# Altium PCB LKAS-EPS_PCB_V2I5.PcbDoc (part 2 of 2)
Units mm, origin at the board's own origin, x right, y up, seen from the top; angles counter-clockwise.
Board outline 49.4 x 33.91 mm, 4 copper layers (Top Layer, Layer 1, Layer 2, Bottom Layer), stack 0.602 mm thick; 54 components, 68 nets, 241 pads, 110 vias.
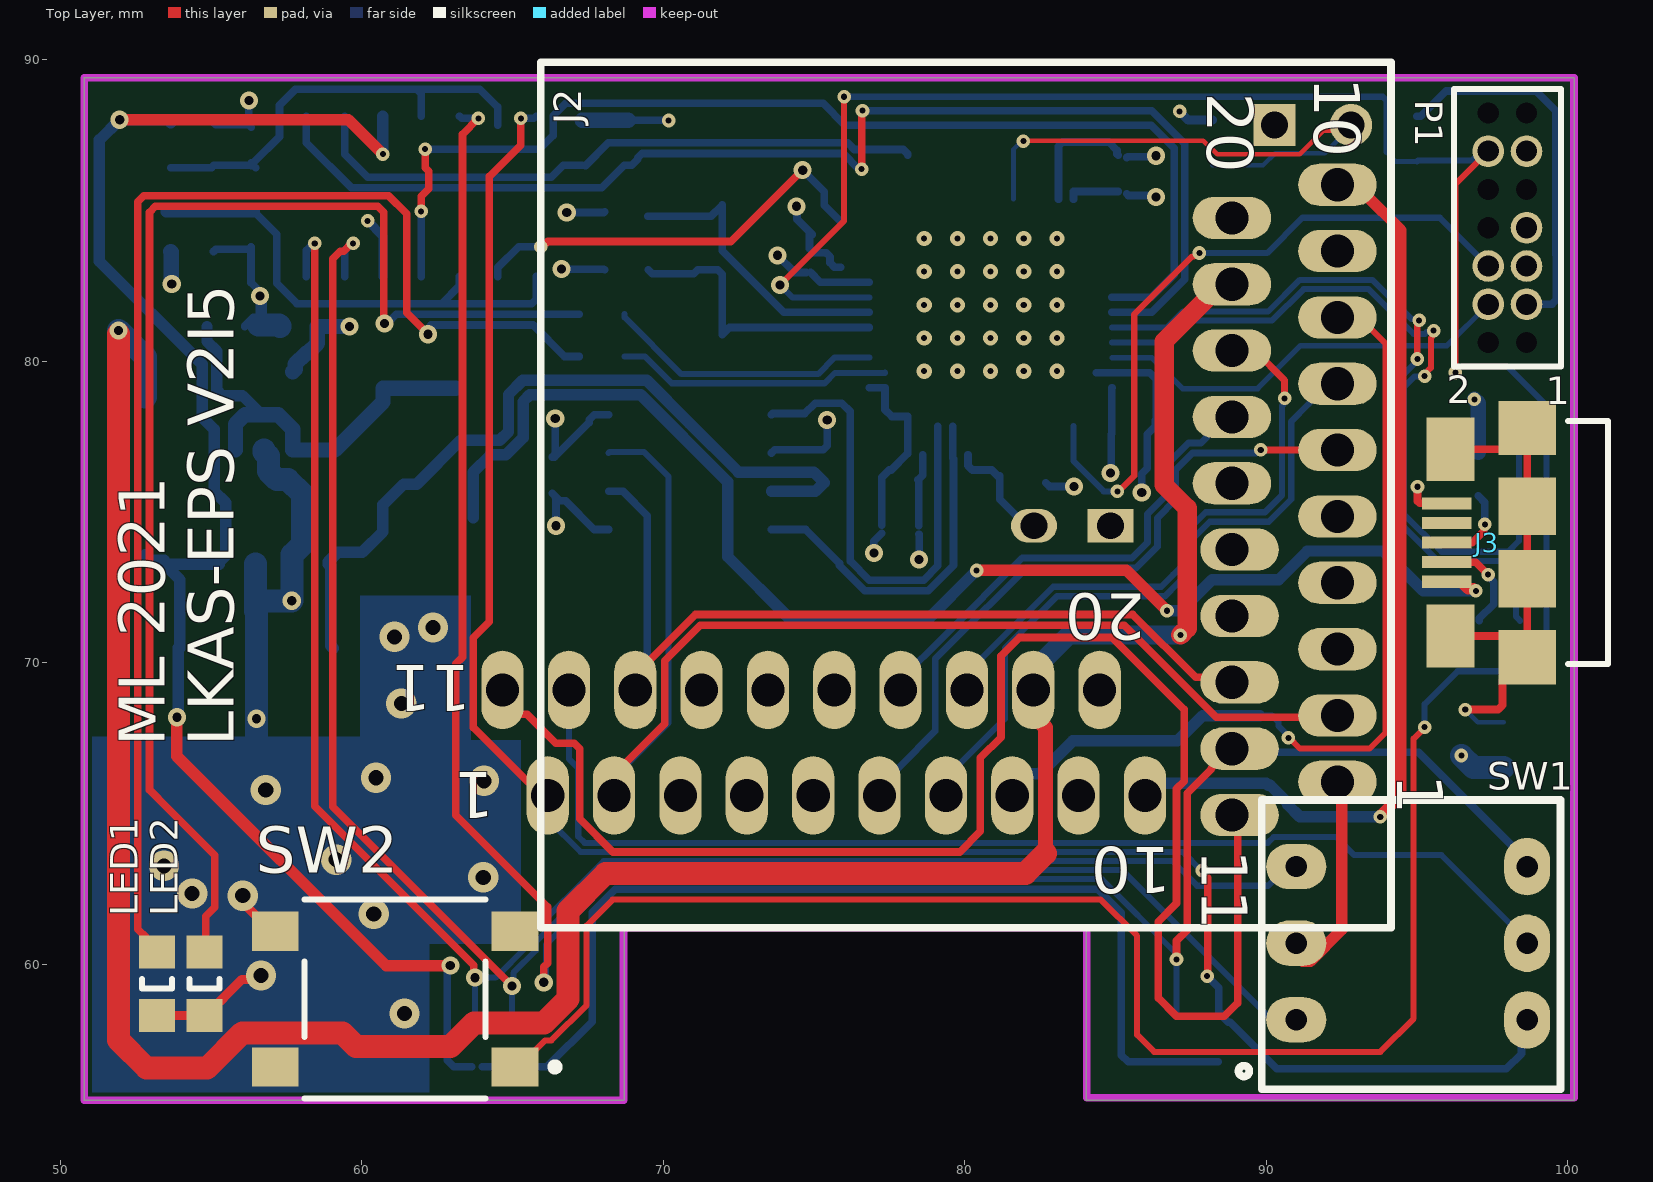
[diagram p0: Top Layer view]

## Via types
v1: diameter 0.45, hole 0.2, Top Layer to Bottom Layer, tented both sides, 38 vias
v2: diameter 0.6, hole 0.305, Top Layer to Bottom Layer, tented both sides, 31 vias
v3: diameter 0.5, hole 0.2, Top Layer to Bottom Layer, 25 vias
v4: diameter 1, hole 0.5, Top Layer to Bottom Layer, tented both sides, 14 vias
v5: diameter 0.45, hole 0.2, Top Layer to Bottom Layer, 2 vias

## Nets (pads, with @x,y where several pads share a name; then routed paths per layer and width w, separated by ;. In a path a pad name is that pad's centre, name@x,y a point inside that pad or via, vN(x,y) a via of type N, cw(c..) or ccw(c..) an arc to the next point about the centre after c; other vN are vias at no path point) (continued)
LDW_OFF_SW: (continued)
  Bottom Layer w0.381: J1.8 81.573,65.854 82.044,66.325 82.49,66.325 83.576,67.412 87.046,67.412 87.884,68.25 89.789,68.25
LKAS_TO_EPS_RX: J2.1 SW1.C1 | length 6.7
  Top Layer w0.381: SW1.C1@91.204,60.11 91.454,60.11 92.496,61.152 92.496,65.918 J2.1
LKAS_TO_EPS_TX: J1.1 R5.1 SW1.1B U4.7 | length 64.8
  Top Layer w0.254: v1(65.278,88.058) 65.278,87.168 64.237,86.127 64.237,71.369 63.703,70.835 63.703,67.859 65.557,66.005 J1.1@66.573,66.005 ; v1(87.879,63.115) 87.879,63.062 88.062,62.88 88.062,59.639 v1(88.036,59.614)
  Bottom Layer w0.2: J1.1 66.173,64.818 67.259,63.732 87.224,63.732 87.84,63.115 v1(87.879,63.115)
  Bottom Layer w0.254: v1(65.278,88.058) 65.713,88.058 U4.7 ; v1(88.036,59.614) 88.417,59.233 88.417,58.361 R5.1 ; R5.1@88.529,58.361 88.529,58.294 88.74,58.083 88.807,58.083 90.35,56.54 97.957,56.54 98.464,57.047 98.464,57.449 SW1.1B@98.582,57.567
LKAS_TO_EPS_TX1: R8.1 SW1.1A U4.13 | length 60.4
  Top Layer w0.254: v1(59.715,83.913) 59.662,83.913 59.404,83.655 59.296,83.655 59.041,83.4 59.041,65.23 64.119,60.152 v2(64.988,59.284)
  Bottom Layer w0.2: R8.1 64.988,58.139 v2(64.988,59.284) 65.033,59.329 65.033,59.724 65.781,60.472 65.781,60.757 68.153,63.129 85.222,63.129 90.781,57.57 SW1.1A@91.204,57.57
  Bottom Layer w0.254: U4.13 59.436,83.673 59.675,83.913 v1(59.715,83.913)
NetC3_1: C3.1 D1.2 D2.2 U3.1 U3.3 | length 14.4
  Bottom Layer w0.381: C3.1 54.873,80.661 55.197,80.338 55.197,79.038 55.368,78.867 56.049,78.867 56.684,78.232
  Bottom Layer w0.508: U3.3 55.819,77.229 55.819,77.917 56.134,78.232 56.684,78.232 57.233,78.232 57.719,77.746 U3.1 59.112,77.059 60.706,78.653 D2.2 D1.2@63.119,79.103
NetLED1_2: LED1.2 R9.2 | length 44.5
  Top Layer w0.254: LED1.2@53.34,60.41 53.29,60.41 52.867,60.833 52.867,60.883 52.578,61.172 52.578,85.297 52.774,85.493 60.891,85.493 61.497,84.887 61.497,81.607 v2(62.205,80.899)
  Bottom Layer w0.254: v2(62.205,80.899) 62.271,80.965 62.271,81.172 62.303,81.204 65.684,81.204 66.726,80.162 R9.2
NetLED2_2: LED2.2 R10.2 | length 43.8
  Top Layer w0.25: 53.573,65.181 55.133,63.62 55.133,61.899 54.839,61.604 54.839,60.461 LED2.2
  Top Layer w0.254: 53.573,65.181 52.967,65.786 52.967,84.941 53.163,85.137 60.535,85.137 60.731,84.941 60.731,81.28 v2(60.757,81.255)
  Bottom Layer w0.254: v2(60.757,81.255) 60.85,81.255 61.155,81.559 R10.2
NRST: P1.12 R12.1 SW2.1 U6.7 | length 106.9
  Top Layer w0.203: SW2.1 65.212,56.602 66.091,57.48 66.293,57.48 67.462,58.65 67.462,61.29 68.326,62.154 84.506,62.154 85.712,60.947 85.712,57.671 86.284,57.099 93.777,57.099 94.883,58.206 94.883,67.486 95.25,67.853 v1(95.25,67.869) ; v2(73.874,82.535) 75.997,84.658 v1(75.997,88.773) ; v1(96.266,79.629) 96.266,85.877 97.307,86.919 P1.12 P1.12@97.257,86.97
  Bottom Layer w0.152: 93.98,86.944 94.298,86.626 R12.1
  Bottom Layer w0.203: v2(73.874,82.535) 74.287,82.122 U6.7@76.831,82.122 ; v1(75.997,88.773) 93.861,88.773 93.98,88.654 93.98,86.944 ; R12.1 95.035,86.665 96.824,86.665 97.129,86.97 P1.12 ; v1(95.25,67.869) 95.25,68.631 96.342,69.723 98.831,69.723 99.289,70.18 99.289,78.539 97.993,79.835 96.472,79.835 v1(96.266,79.629)
OSC_IN: C5.1 U6.5 X1.2 | length 9.6
  Bottom Layer w0.254: C5.1 69.639,82.902 71.018,82.902 71.149,83.033 71.809,83.033 71.958,82.884 X1.2 72.198,81.122 U6.5@76.831,81.122
OSC_OUT: C6.1 U6.6 X1.1 | length 9.9
  Bottom Layer w0.254: C6.1@69.494,84.811 71.586,84.811 X1.1 71.958,83.668 74.004,81.622 U6.6@76.831,81.622
PA0: U6.10
PA1: U6.11
PA4: U6.14
PA5: U6.15
PA6: U6.16
PA7: U6.17
PA8: U6.29
PA15: U6.38
PB0: U6.18
PB1: U6.19
PB3: U6.39
PB4: U6.40
PB5: U6.41
PB6: U6.42
PB7: U6.43
PB10: U6.21
PB11: U6.22
PB12: U6.25
PB13: U6.26
PB14: U6.27
PB15: U6.28
PC15: U6.4
SHIELD: J3.6 J3.7 J3.8 J3.9 J3.10 J3.11 R13.1 | length 18
  Top Layer w0.254: J3.6 97.954,70.89 J3.8 ; J3.7 97.954,77.09 J3.9 J3.11 J3.10 J3.8 ; v1(96.596,68.453) 97.682,68.453 97.831,68.602 97.831,69.417 98.604,70.19 J3.8
  Bottom Layer w0.152: v1(96.596,68.453) 97.015,68.035 R13.1
STATUS: R9.1 U6.2 | length 9.1
  Bottom Layer w0.203: R9.1 69.393,80.162 70.282,79.273 75.355,79.273 75.694,79.613 77.347,79.613 U6.2
SWCLK: P1.6 U6.37 | length 22.9
  Top Layer w0.203: v1(85.06,75.689) 85.106,75.689 85.62,76.204 85.62,81.556 87.546,83.482 87.602,83.482 87.712,83.591 v1(87.779,83.591)
  Bottom Layer w0.203: U6.37@83.606,77.847 83.606,76.693 84.61,75.689 v1(85.06,75.689) ; v1(87.779,83.591) 90.025,83.591 91.194,84.76 95.758,84.76 P1.6
SWDIO: P1.4 U6.34 | length 14.1
  Bottom Layer w0.178: U6.34@84.881,80.122 86.197,80.122 87.224,79.096 89.713,79.096 91.136,80.519 95.988,80.519 P1.4
UART2_RX: R4.1 U4.2 U6.13 | length 20.8
  Bottom Layer w0.254: U4.2 59.436,86.868 60.198,86.106 66.289,86.106 66.682,86.499 R4.1 ; R4.1@67.423,86.487 68.185,87.249 76.113,87.249 76.338,87.024 77.957,87.024 78.106,86.875 78.106,86.84
UART2_TX: U4.9 U6.12 | length 14
  Top Layer w0.254: v1(65.942,83.801) 65.995,83.801 66.166,83.972 72.238,83.972 74.605,86.339 v2(74.625,86.339)
  Bottom Layer w0.254: U4.9 64.516,83.111 65.209,83.804 65.939,83.804 v1(65.942,83.801) ; v2(74.625,86.339) 75.129,85.836 75.336,85.628 75.336,85.174 75.888,84.622
UART3_RX: R7.1 U4.1 U6.31 | length 41.1
  Top Layer w0.254: v1(76.581,86.372) 76.581,88.285 v1(76.609,88.312)
  Bottom Layer w0.254: U4.1 58.166,87.249 59.665,85.75 67.961,85.75 68.709,86.499 68.959,86.499 69.157,86.697 69.157,86.745 69.306,86.893 75.966,86.893 76.487,86.372 v1(76.581,86.372) ; v1(76.609,88.312) 86.205,88.312 87.3,87.217 87.3,82.728 86.194,81.622 U6.31@84.881,81.622
UART3_TX: U4.11 U6.30 | length 37.4
  Top Layer w0.254: v1(61.976,84.971) 61.976,85.471 62.23,85.725 62.23,86.304 62.109,86.425 v1(62.109,87.037)
  Bottom Layer w0.254: U4.11 v1(61.976,84.971) ; v1(62.109,87.037) 65.896,87.037 66.349,87.491 66.349,88.136 66.765,88.553 75.308,88.553 76.028,87.833 86.181,87.833 86.944,87.07 86.944,82.88 86.186,82.122 U6.30@84.881,82.122
USB_N: R14.1 U6.32 | length 24.9
  Top Layer w0.203: v1(95.005,80.078) 95.005,81.232 95.068,81.294 v1(95.068,81.361)
  Bottom Layer w0.203: U6.32@84.881,81.122 86.704,81.122 87.234,81.653 90.061,81.653 91.111,82.702 93.516,82.702 94.81,81.408 95.021,81.408 v1(95.068,81.361) ; v1(95.005,80.078) 95.005,80.016 94.255,79.266 94.255,74.808 95.683,73.381 98.154,73.381 98.273,73.262 98.273,71.541 R14.1
USB_P: R15.1 R16.1 U6.33 | length 26.2
  Top Layer w0.203: v1(95.248,79.51) 95.248,79.577 95.459,79.787 95.459,80.774 95.498,80.813 95.498,80.969 v1(95.545,81.016)
  Bottom Layer w0.203: U6.33@84.881,80.622 86.845,80.622 87.571,81.348 90.187,81.348 91.237,82.398 93.39,82.398 94.88,80.908 95.256,80.908 95.317,80.969 95.498,80.969 v1(95.545,81.016) ; v1(95.248,79.51) 95.236,79.498 94.918,79.498 94.56,79.14 94.56,74.934 95.809,73.685 98.019,73.685 98.378,74.045 R15.1 R16.1
USB_R_N: J3.2 R14.2 | length 3.3
  Top Layer w0.254: J3.2 96.938,73.34 v1(97.352,72.927)
  Bottom Layer w0.254: R14.2 97.064,71.474 97.536,71.946 97.536,72.69 97.352,72.874 v1(97.352,72.927)
USB_R_P: J3.3 R15.2 | length 2.7
  Top Layer w0.254: J3.3 96.831,73.99 97.21,74.369 97.21,74.559 v1(97.248,74.596)
  Bottom Layer w0.254: R15.2 97.248,75.32 v1(97.248,74.596)
V_USB: D1.1 J3.1 | length 44.7
  Top Layer w0.381: v1(80.391,73.064) 80.402,73.075 85.361,73.075 v1(86.706,71.73) ; J3.1 95.988,72.681 96.463,72.681 96.692,72.452 96.868,72.452 96.93,72.39 v1(96.948,72.39)
  Bottom Layer w0.381: D1.1 63.703,76.328 64.273,76.897 64.784,76.897 65.353,77.466 65.353,78.665 65.576,78.888 69.252,78.888 72.136,76.004 72.136,73.528 74.213,71.45 78.777,71.45 v1(80.391,73.064) ; v1(86.706,71.73) 87.173,71.73 88.207,72.764 90.417,72.764 91.364,73.711 93.878,73.711 95.199,72.39 v1(96.948,72.39)
pads on no net: J1.3 J1.4 J1.5 J1.9 J1.15 J1.16 J1.20 J2.3 J2.4 J2.5 J2.9 J2.15 J2.16 J2.20 J3.4 P1.1 P1.2 P1.8 P1.9 P1.10 P1.13 P1.14 SW2.2 SW2.3 U3.4

## Polygon pours and split planes (outlines as drawn)
GND on Layer 1 (split plane): 99.693,88.898 99.693,56.009 84.534,56.009 84.534,61.214 84.524,61.314 84.495,61.409 84.448,61.498 84.384,61.575 84.307,61.638 84.219,61.686 84.123,61.715 84.023,61.724 68.707,61.724 68.607,61.715 68.512,61.686 68.423,61.638 68.346,61.575 68.283,61.498 68.235,61.409 68.206,61.314 68.197,61.214 68.197,56.009 51.31,56.009 51.31,88.898
+3V3 on Layer 2 (split plane): 99.693,88.898 99.693,56.009 84.534,56.009 84.534,61.214 84.524,61.314 84.495,61.409 84.448,61.498 84.384,61.575 84.307,61.638 84.219,61.686 84.123,61.715 84.023,61.724 68.707,61.724 68.607,61.715 68.512,61.686 68.423,61.638 68.346,61.575 68.283,61.498 68.235,61.409 68.206,61.314 68.197,61.214 68.197,56.009 51.31,56.009 51.31,88.898

## Keep-outs
Keep-Out Layer:
  lines w0.254: 50.8,55.499 68.682,55.499 68.682,61.214 84.049,61.214 84.049,55.575 100.203,55.575 100.203,89.408 50.8,89.408 50.8,55.499

## Other copper
Bottom Layer:
  rectangle net GND: 59.766,60.681 65.278,67.437
  rectangle net GND: 59.944,62.509 63.627,72.238
  region net GND: 62.255,55.753 62.255,67.564 51.054,67.564 51.054,55.753

## Silkscreen, mask and mechanical layers (free items; w line width, h text height)
Top Overlay:
  text "ML 2021  / LKAS-EPS V2I5" at 55.753,67.234 h1.52 r90

## Dimensions
100.203,55.575 to 100.203,89.408 on Top Component Center
50.8,55.118 to 100.203,55.118 on Top Component Center
66.173,65.605 to 50.8,89.408 on Top Component Center
66.173,65.605 to 50.8,55.118 on Top Component Center

## Text inside footprints (layer, text, board x,y; h text height)
J1: Top Overlay "10" at 86.843,63.881 h1.52 r180; Top Overlay "20" at 85.979,72.288 h1.52 r180; Top Overlay "11" at 63.633,69.923 h1.52 r180; Top Overlay "1" at 64.395,66.367 h1.52 r180
J2: Top Overlay "10" at 91.596,89.412 h1.52 r270; Top Overlay "20" at 88.04,88.904 h1.52 r270; Top Overlay "11" at 87.859,63.801 h1.52 r270; Top Overlay "1" at 94.336,66.315 h1.52 r270
J3: Mechanical 1 "PCB Edge" at 99.416,60.782 h1 r90
P1: Top Overlay "1" at 99.271,78.57 h0.91; Top Overlay "2" at 95.987,78.613 h0.91